# Altium PCB realsense_bridge.PcbDoc
Units mil, origin at the board's own origin, x right, y up, seen from the top; angles counter-clockwise.
Board outline 6000 x 4000 mil, 2 copper layers (Top Layer, Bottom Layer); 2 components, 10 nets, 22 pads, 0 vias.
Unrouted connection lines stored in the file: 9.
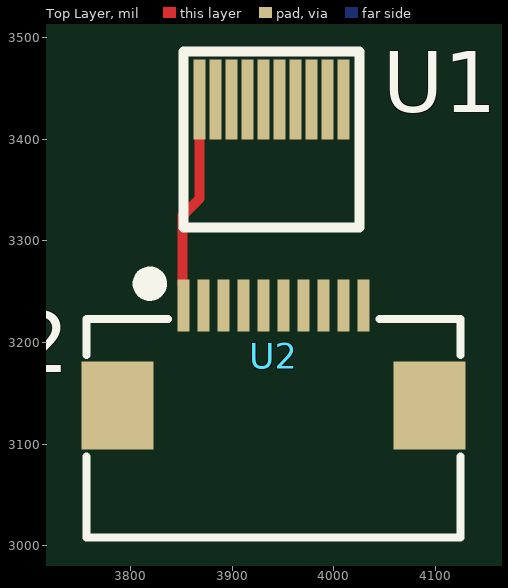
[diagram p0: Top Layer view]
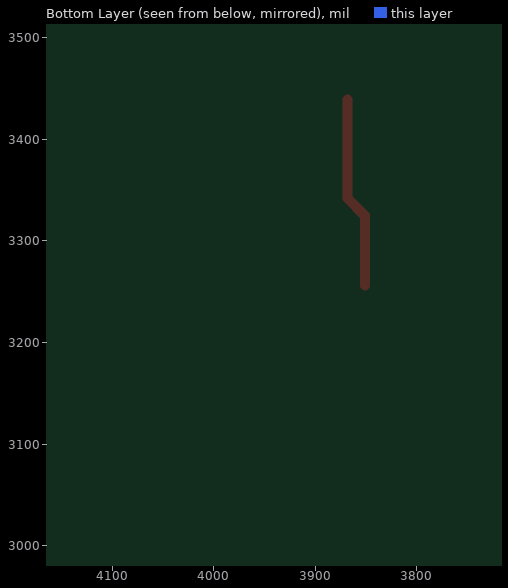
[diagram p1: Bottom Layer view, seen from below]

## Layer stack, top to bottom
Top Solder: solder mask 0.4, Solder Resist, Dk 3.5
Top Layer: signal copper 1.4
Dielectric 1: dielectric 12.6, FR-4, Dk 4.8
Bottom Layer: signal copper 1.4
Bottom Solder: solder mask 0.4, Solder Resist, Dk 3.5

## Board outline
1000,1000 7000,1000 7000,5000 1000,5000

## Design rules (kind name [scope] priority, off if disabled: settings)
Clearance [All] p1: gap=2 ignorepadtopadclearanceinfootprint=FALSE
HoleToHoleClearance [All] p1: gap=1 allowstackedmicrovias=TRUE
MinimumSolderMaskSliver [All] p1: minsoldermaskwidth=1
PolygonConnect [All] p1: connectstyle=Relief reliefconductorwidth=10 reliefentries=4 polygonreliefangle="90 Angle" airgapwidth=10
RoutingVias [All] p1: holewidth=12 width=24 viastyle="Through Hole" minholewidth=12 minwidth=20 maxholewidth=28 maxwidth=50
SilkToSilkClearance [All] p1: silktosilkclearance=1
SilkToSolderMaskClearance [IsPad] p1: minsilkscreentomaskgap=0 clearancetoexposedcopper=TRUE
SolderMaskExpansion [All] p1: expansion=4 istentingtop=FALSE
UnRoutedNet [All] p1: checkbadconnections=TRUE
Width [All] p1: maxlimit=50 minlimit=5 preferedwidth=10
25 further rules are at their usual default settings.

## Components (designator, comment, footprint, x,y, rotation, side; value= is the part's Value field where it differs from the comment)
U1 "Component_1" IPEX-20346-10T 3868.11,3454.72 r0 top
U2 "Component_1" "FPC0.5 2H-WS-10P" 3940.94,3137.8 r0 top

## Footprints (in the part's own frame and the unit in brackets; to place one, negate y for a bottom-side part, rotate by r counter-clockwise, add the part's x,y. Pads: shape width x height; smd on the part's side, far side on the other; paste and mask are expansions set on the pad)
"FPC0.5 2H-WS-10P" [mm] "长：9.2mm，宽：5.2mm，高：2mm 淘宝ID:黄晶宝石   店铺网址:https://shop463601444.taobao.com"
  rect 1.8x2.2 smd: 0(-3.9,0) 0(3.9,0)
  rect 0.3x1.3 smd: 1(-2.25,2.497) 2(-1.75,2.497) 3(-1.25,2.497) 4(-0.75,2.497) 5(-0.25,2.497) 6(0.25,2.497) 7(0.75,2.497) 8(1.25,2.497) 9(1.75,2.497) 10(2.25,2.497)
  silkscreen extent -4.67,-3.3 4.67,3.23, body extent -4.6,-3.15 4.6,2.85, height 2
IPEX-20346-10T [mm]
  rect 0.3x2 smd: 1(0,-0.4) 2(0.4,-0.4) 3(0.8,-0.4) 4(1.2,-0.4) 5(1.6,-0.4) 6(2,-0.4) 7(2.4,-0.4) 8(2.8,-0.4) 9(3.2,-0.4) 10(3.6,-0.4)
  silkscreen extent -0.4,-3.6 4,0.8

## Nets (pads, with @x,y where several pads share a name; then routed paths per layer and width w, separated by ;. In a path a pad name is that pad's centre, name@x,y a point inside that pad or via, vN(x,y) a via of type N, cw(c..) or ccw(c..) an arc to the next point about the centre after c; other vN are vias at no path point)
NetU1_1: U1.1 U2.1 | length 190.1
  Top Layer w10: U2.1@3851.14,3255.91 3851.14,3324.72 3868.11,3341.69 U1.1
NetU1_2: U1.2 U2.2
NetU1_3: U1.3 U2.3
NetU1_4: U1.4 U2.4
NetU1_5: U1.5 U2.5
NetU1_6: U1.6 U2.6
NetU1_7: U1.7 U2.7
NetU1_8: U1.8 U2.8
NetU1_9: U1.9 U2.9
NetU1_10: U1.10 U2.10
pads on no net: U2.0